# Altium PCB ResCaps.PcbDoc
Units mil, origin at the board's own origin, x right, y up, seen from the top; angles counter-clockwise.
Board outline 1000 x 1000 mil, 2 copper layers (Top Layer, Bottom Layer); 12 components, 6 nets, 21 pads, 0 vias.
Unrouted connection lines stored in the file: 10.
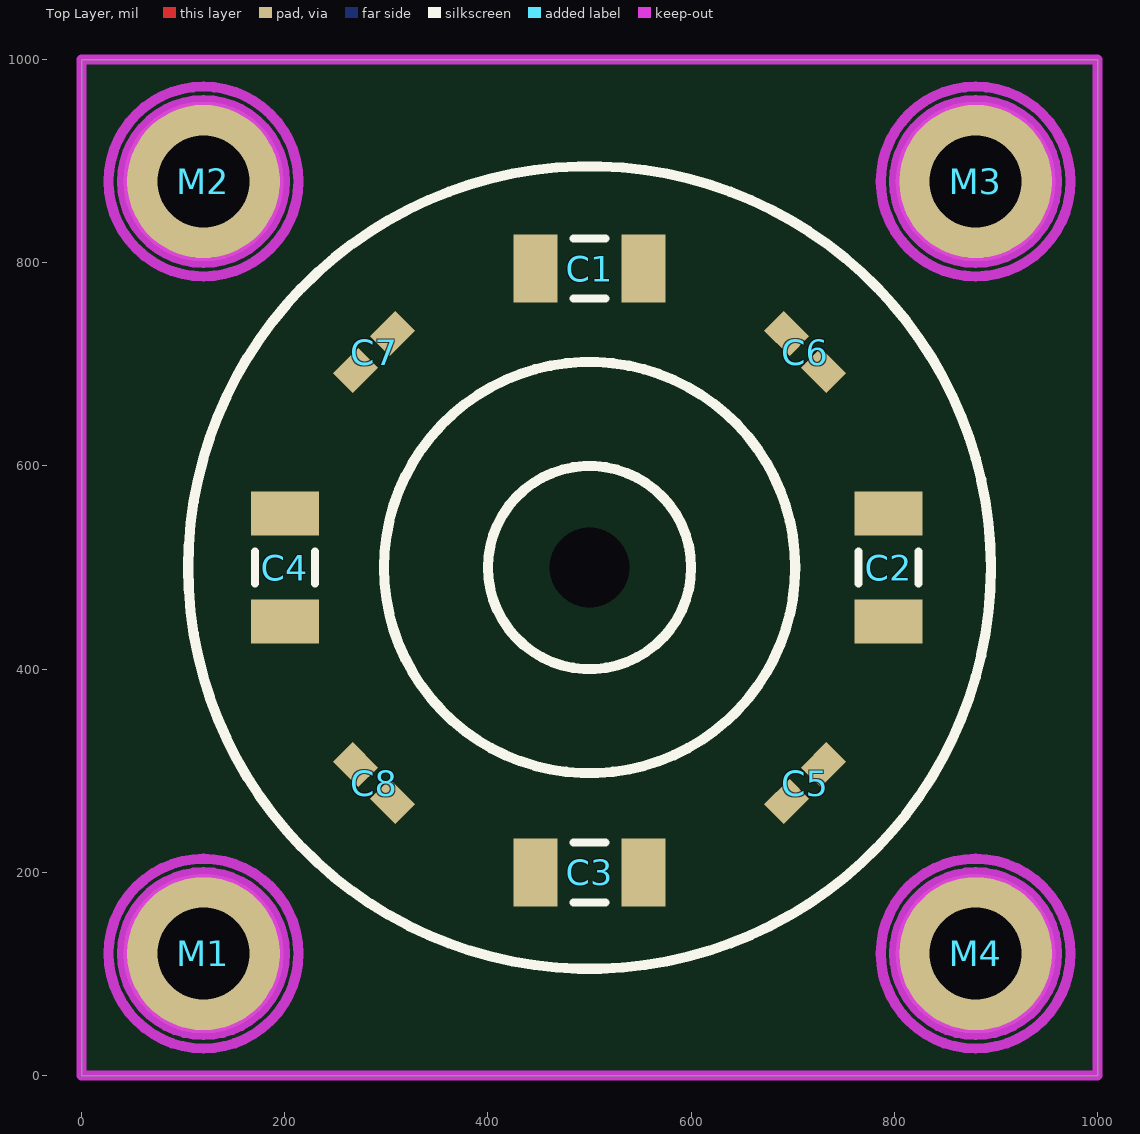
[diagram p0: Top Layer view]
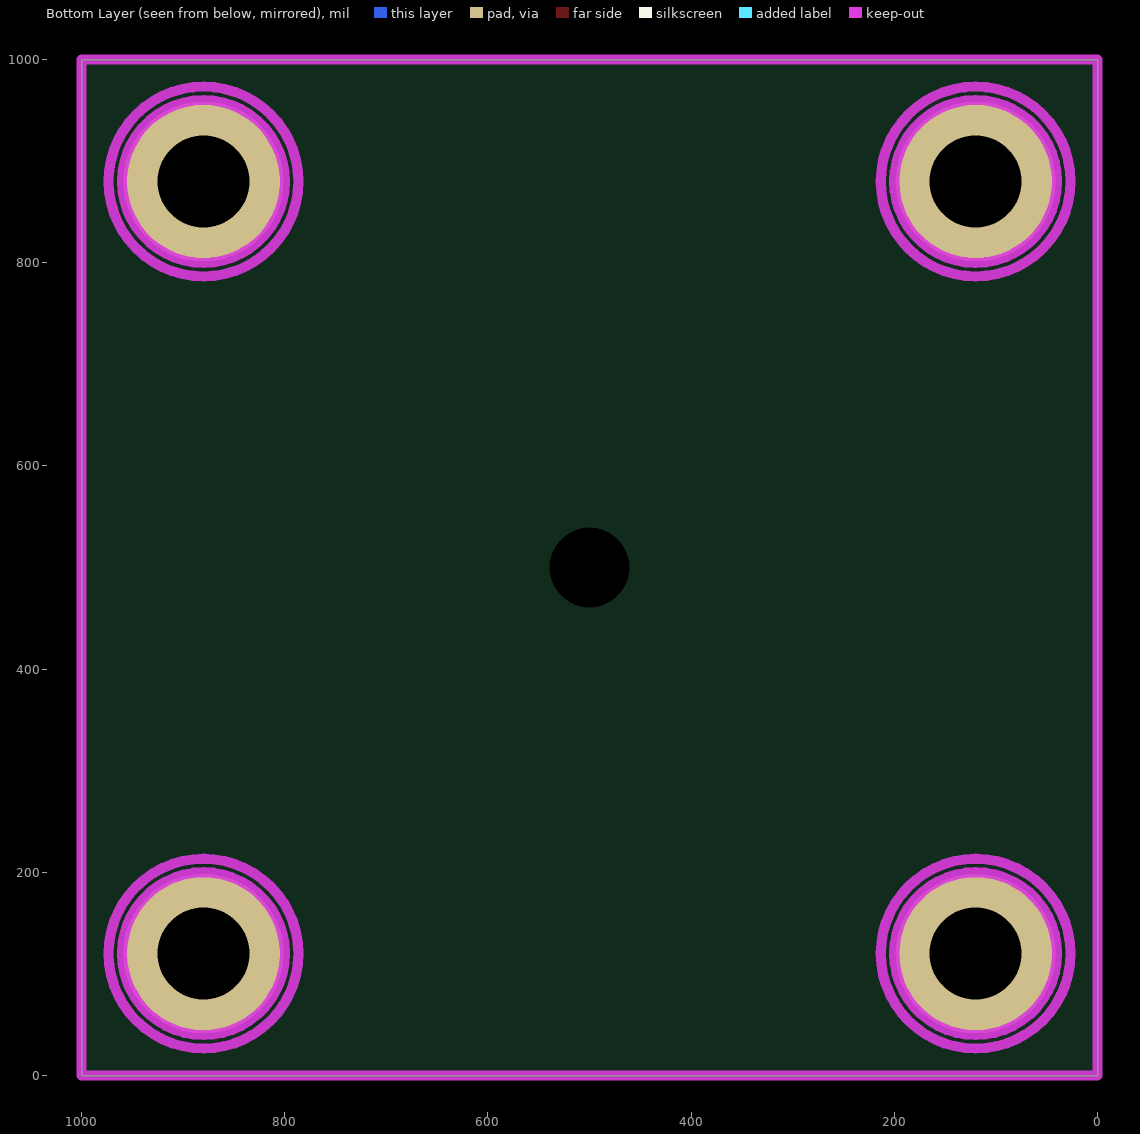
[diagram p1: Bottom Layer view, seen from below]

## Layer stack, top to bottom
Top Solder: solder mask 0.4, Solder Resist, Dk 3.5
Top Layer: signal copper 1.4
Dielectric 1: dielectric 12.6, FR-4, Dk 4.8
Bottom Layer: signal copper 1.4
Bottom Solder: solder mask 0.4, Solder Resist, Dk 3.5

## Board outline
0,0 0,1000 1000,1000 1000,0

## Design rules (kind name [scope] priority, off if disabled: settings)
Clearance [All] p1: gap=10
PolygonConnect [All] p1: connectstyle=Relief reliefconductorwidth=10 reliefentries=4 polygonreliefangle="90 Angle" airgapwidth=10
RoutingVias [All] p1: holewidth=28 width=50 viastyle="Through Hole" minholewidth=28 minwidth=50 maxholewidth=28 maxwidth=50
SolderMaskExpansion [All] p1: expansion=4
Width [All] p1: maxlimit=10 minlimit=10 preferedwidth=10
30 further rules are at their usual default settings.

## Components (designator, comment, footprint, x,y, rotation, side; value= is the part's Value field where it differs from the comment)
C1 "10uF" CAP-1206 500,794.26 r180 top
C2 "10uF" CAP-1206 794.26,500 r90 top
C3 "10uF" CAP-1206 500,200 r0 top
C4 "10uF" CAP-1206 200,500 r270 top
C5 "22pF" CAP-0402 712.13,287.87 r45 top
C6 "22pF" CAP-0402 712.13,712.13 r315 top
C7 "22pF" CAP-0402 287.87,712.13 r225 top
C8 "22pF" CAP-0402 287.87,287.87 r315 top
M1 "Screw hole" MECH-SCREW-M2.3 120,120 r90 top locked
M2 "Screw hole" MECH-SCREW-M2.3 120,880 r90 top locked
M3 "Screw hole" MECH-SCREW-M2.3 880,880 r90 top locked
M4 "Screw hole" MECH-SCREW-M2.3 880,120 r90 top locked

## Footprints (in the part's own frame and the unit in brackets; to place one, negate y for a bottom-side part, rotate by r counter-clockwise, add the part's x,y. Pads: shape width x height; smd on the part's side, far side on the other; paste and mask are expansions set on the pad)
CAP-0402 [mm] "Capacitor, SMD, 0402"
  rect 0.9x0.7 smd: 1(-0.65,0) 2(0.65,0)
  body extent -0.5,-0.25 0.5,0.25, height 0.55
CAP-1206 [mm] "SMD capacitor, 1206"
  rect 1.1x1.7 smd: 1(-1.35,0) 2(1.35,0)
  silkscreen extent -0.4,-0.75 0.4,0.75, body extent -1.6,-0.8 1.6,0.8, height 1
MECH-SCREW-M2.3 [mm] "Screw M2.3"
  round 4 hole 2.3 unplated: 0(0,0)
  Keep-Out Layer circle w0.254: c0,0 r2.373
  Keep-Out Layer circle w0.254: c0,0 r2.036
  body extent -1.9,-1.9 1.9,1.9, height 2

## Part data
C1 C2 C3 C4 C5 C6 C7 C8: library part Cap, "Capacitor"

## Free pads (board coordinates)
  rect 0x0 hole 78.74: 0(500,500)

## Nets (pads, with @x,y where several pads share a name; then routed paths per layer and width w, separated by ;. In a path a pad name is that pad's centre, name@x,y a point inside that pad or via, vN(x,y) a via of type N, cw(c..) or ccw(c..) an arc to the next point about the centre after c; other vN are vias at no path point)
GND: C5.1 C6.1 C7.1 C8.1
NetC1_1: C1.1 C5.2
NetC2_1: C2.1 C6.2
NetC3_1: C3.1 C7.2
NetC4_1: C4.1 C8.2
VCC: C1.2 C2.2 C3.2 C4.2
pads on no net: M1.0 M2.0 M3.0 M4.0

## Polygon pours and split planes (outlines as drawn)
no net on Top Layer "Plane" (solid, shelved, pour order 2): 0,0 0,1000 1000,1000 1000,0

## Keep-outs
Keep-Out Layer:
  the board outline again, w10

## Silkscreen, mask and mechanical layers (free items; w line width, h text height)
Top Overlay:
  circle w10: c500,500 r100
  circle w10: c500,500 r202.39
  circle w10: c500,500 r395.03
BoardOutline:
  the board outline again, w8